# Altium PCB Modbus_Connecter.PcbDoc
Units mil, origin at the board's own origin, x right, y up, seen from the top; angles counter-clockwise.
Board outline 1082.68 x 2559.06 mil, 2 copper layers (Top Layer, Bottom Layer); 26 components, 26 nets, 90 pads, 1 vias.
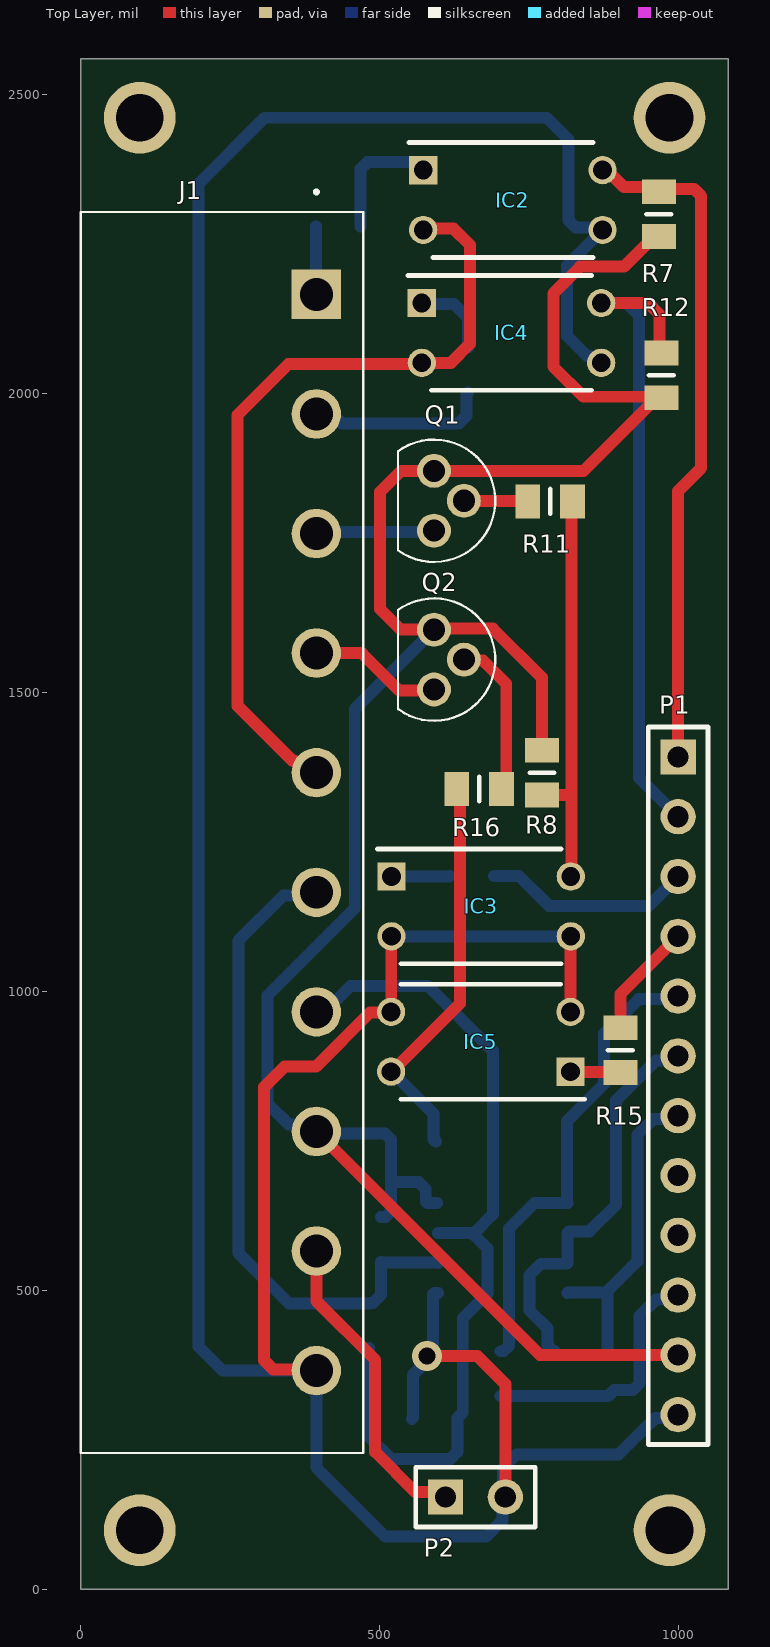
[diagram p0: Top Layer view]
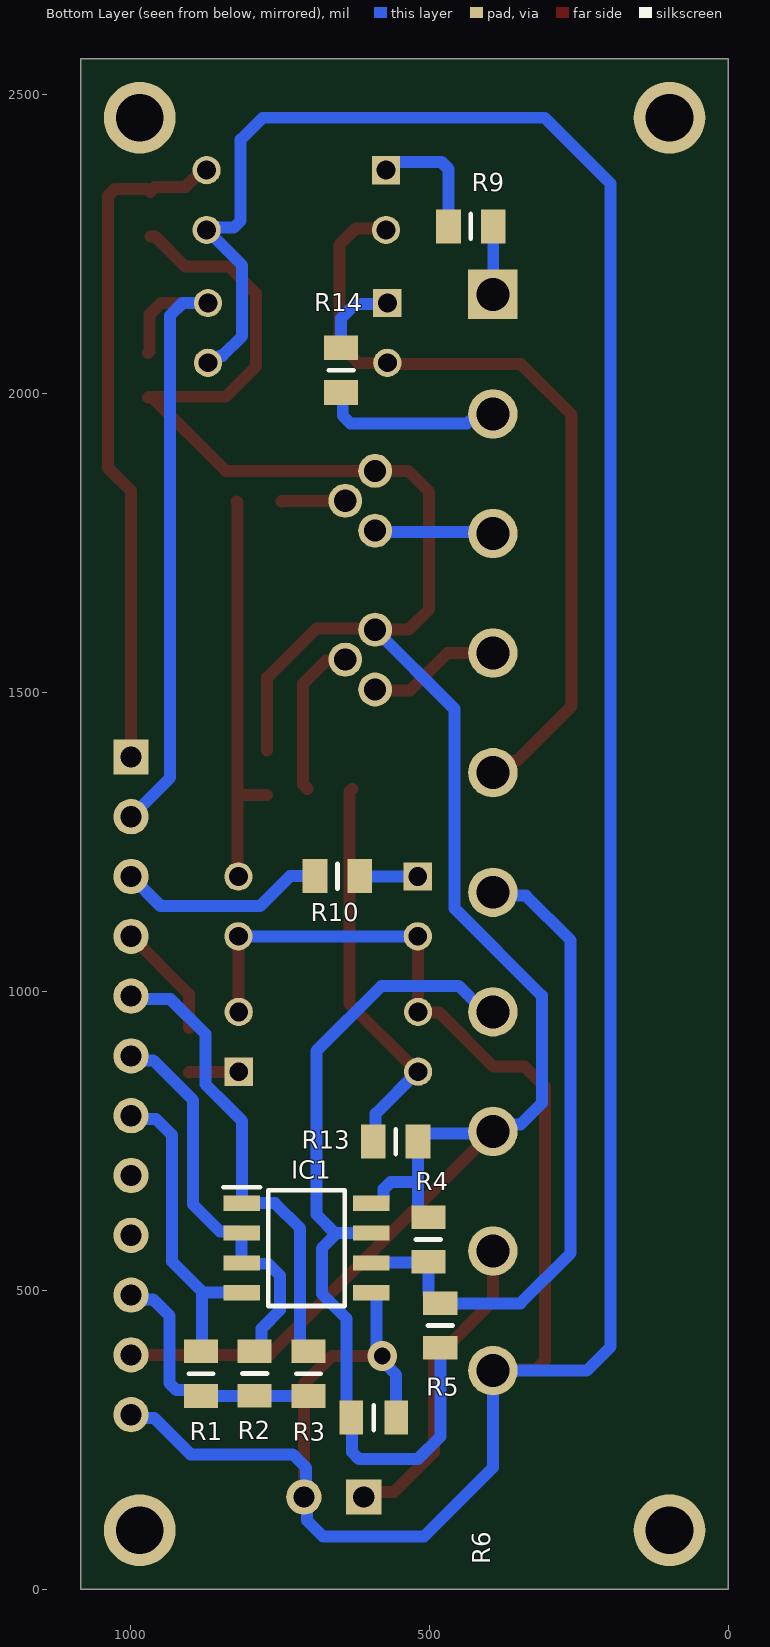
[diagram p1: Bottom Layer view, seen from below]
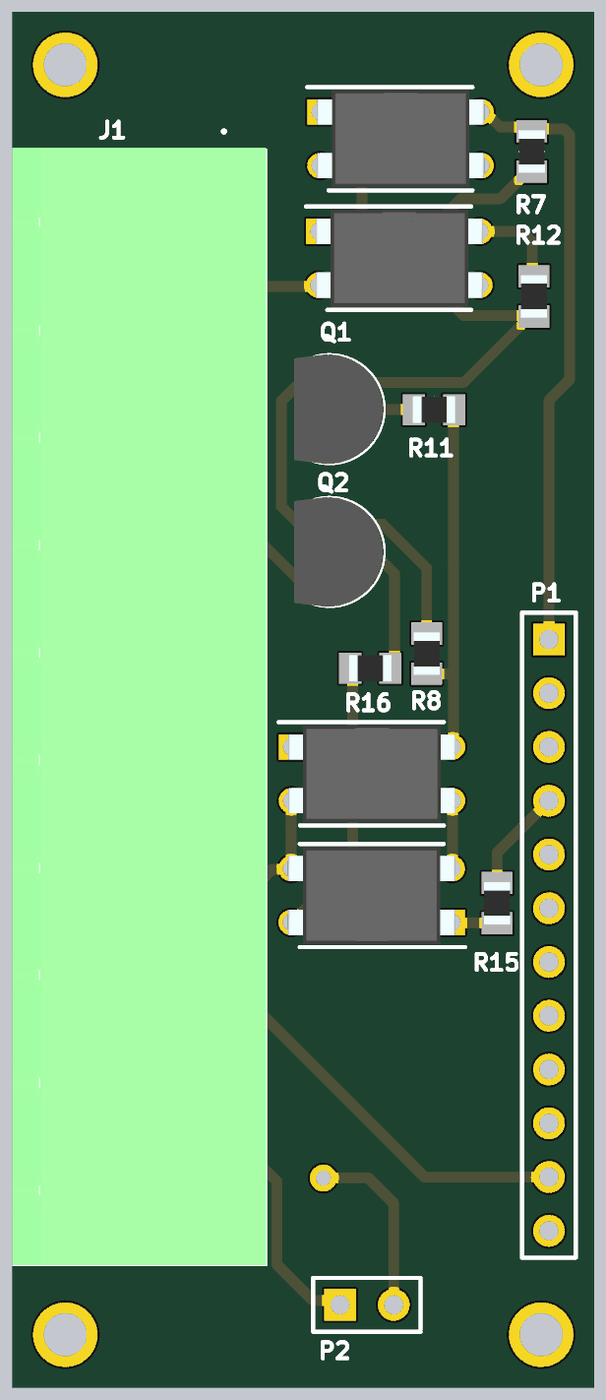
[diagram p2: 3D render of the assembled board from above, using the file's embedded part models]
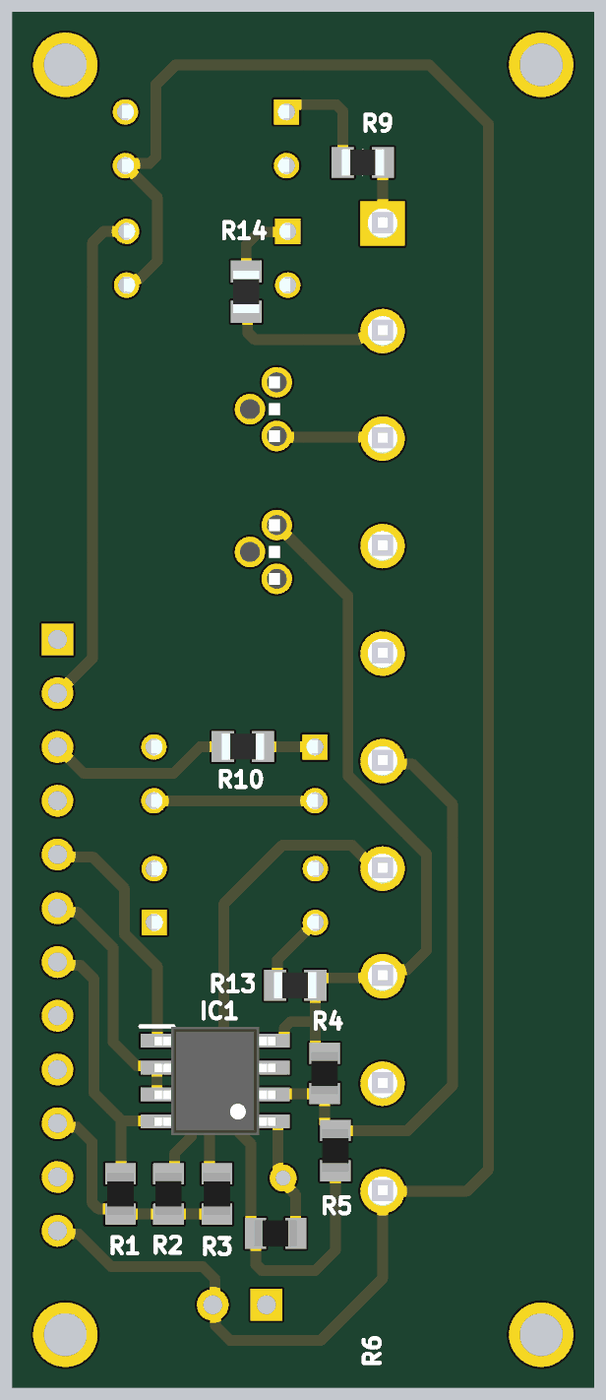
[diagram p3: 3D render of the assembled board from below, using the file's embedded part models]

## Layer stack, top to bottom
Top Solder: solder mask 0.4, Solder Resist, Dk 3.5
Top Layer: signal copper 1.4
Dielectric 1: dielectric 12.6, FR-4, Dk 4.8
Bottom Layer: signal copper 1.4
Bottom Solder: solder mask 0.4, Solder Resist, Dk 3.5

## Board outline
0,0 0,2559.06 1082.68,2559.06 1082.68,0

## Design rules (kind name [scope] priority, off if disabled: settings)
Clearance [All] p1: gap=10 ignorepadtopadclearanceinfootprint=FALSE except(0: Arc-Hole Track-Hole SMDPad-Hole THPad-Hole Via-Hole Fill-Hole Poly-Hole Region-Hole Text-Hole)
PolygonConnect [All] p1: connectstyle=Relief reliefconductorwidth=10 reliefentries=4 polygonreliefangle="90 Angle" airgapwidth=10
RoutingVias [All] p1: holewidth=28 width=50 viastyle="Through Hole" minholewidth=28 minwidth=50 maxholewidth=28 maxwidth=50
SolderMaskExpansion [All] p1: expansion=4 istentingtop=FALSE
Width [All] p1: maxlimit=30 minlimit=10 preferedwidth=20
30 further rules are at their usual default settings.

## Classes and differential pairs
component class Sheet4: IC2 IC3 IC4 IC5 Q1 Q2 R7 R8 R9 R10 R11 R12 R13 R14 R15 R16
component class Sheet3: IC1 J1 P1 P2 R1 R2 R3 R4 R5 R6

## Components (designator, comment, footprint, x,y, rotation, side; value= is the part's Value field where it differs from the comment)
IC1 "MAX485CSA" SOIC127P600X175-8N 705.47,570.4 r180 bottom
IC2 "PC817X2NSZ0F" DIP762W60P254L458H400Q4N 722.45,2323.04 r0 top
IC3 "PC817X2NSZ0F" DIP762W60P254L458H400Q4N 669.29,1141.73 r0 top
IC4 "PC817X2NSZ0F" DIP762W60P254L458H400Q4N 720.15,2100.81 r0 top
IC5 "PC817X2NSZ0F" DIP762W60P254L458H400Q4N 668.76,915.32 r180 top
J1 "1757323" 1757323 393.7,2165.35 r270 top
P1 "Header 12" HDR1X12 998.8,1391.68 r270 top
P2 "Header 2" HDR1X2 609.8,153.93 r0 top
Q1 "BC547BG" TO-92_(TO-226) 590.55,1870.08 r90 top
Q2 "BC547BG" TO-92_(TO-226) 590.55,1604.48 r90 top
R1 "10k" RESC2012X60N 881.8,360.34 r270 bottom
R2 "10k" RESC2012X60N 792.26,360.43 r270 bottom
R3 "10k" RESC2012X60N 702.09,360.34 r270 bottom
R4 "20k" RESC2012X60N 501.64,584.58 r90 bottom
R5 "120R" RESC2012X60N 481.66,440.85 r90 bottom
R6 "20k" RESC2012X60N 592.84,286.89 r0 bottom
R7 "RN73C2A10KLTDF" RESC2012X65N 966.56,2299.38 r270 top
R8 "RN73C2A10KLTDF" RESC2012X65N 771.13,1365.3 r90 top
R9 "PCF0805R-1K0BI" RESC2012X65N 430.52,2278.91 r0 bottom
R10 "PCF0805R-1K0BI" RESC2012X65N 653.69,1192.45 r180 bottom
R11 "PCF0805R-1K0BI" RESC2012X65N 784.78,1818.99 r180 top
R12 "RN73C2A10KLTDF" RESC2012X65N 970.86,2029.79 r270 top
R13 "RN73C2A10KLTDF" RESC2012X65N 556.28,748.33 r180 bottom
R14 "PCF0805R-1K0BI" RESC2012X65N 647.57,2038.61 r90 bottom
R15 "PCF0805R-1K0BI" RESC2012X65N 902.1,901.2 r270 top
R16 "PCF0805R-1K0BI" RESC2012X65N 666.14,1338.09 r0 top

## Footprints (in the part's own frame and the unit in brackets; to place one, negate y for a bottom-side part, rotate by r counter-clockwise, add the part's x,y. Pads: shape width x height; smd on the part's side, far side on the other; paste and mask are expansions set on the pad)
1757323 [mm]
  rect 2.1x2.1 hole 1.4: 1(0,0)
  round 2.1 hole 1.4: 2(5.08,0) 3(10.16,0) 4(15.24,0) 5(20.32,0) 6(25.4,0) 7(30.48,0) 8(35.56,0) 9(40.64,0) 10(45.72,0)
  silkscreen extent -4.4,-10 49.22,2, body extent -3.58,-10 49.22,2, height 9.2
DIP762W60P254L458H400Q4N [mm]
  rect 1.2x1.2 hole 0.8: 1(-3.81,1.27)
  round 1.2 hole 0.8: 2(-3.81,-1.27) 3(3.81,-1.27) 4(3.81,1.27)
  silkscreen extent -4.41,-2.44 3.4,2.44, body extent -3.96,-2.29 3.96,2.29, height 4
HDR1X2 [mm] "Connector; Header; 2 Position"
  rect 1.5x1.5 hole 0.9: 1(0,0)
  round 1.5 hole 0.9: 2(2.54,0)
  silkscreen extent -1.27,-1.27 3.81,1.27
HDR1X12 [mm] "Connector; Header; 12 Position"
  rect 1.5x1.5 hole 0.9: 1(0,0)
  round 1.5 hole 0.9: 2(2.54,0) 3(5.08,0) 4(7.62,0) 5(10.16,0) 6(12.7,0) 7(15.24,0) 8(17.78,0) 9(20.32,0) 10(22.86,0) 11(25.4,0) 12(27.94,0)
  silkscreen extent -1.27,-1.27 29.21,1.27
RESC2012X60N [mm]
  rect 1x1.45 smd: 1(-0.95,0) 2(0.95,0)
  silkscreen extent 0,-0.53 0,0.53, body extent -1,-0.63 1,0.63, height 0.5
RESC2012X65N [mm]
  rect 1.05x1.45 smd: 1(-0.95,0) 2(0.95,0)
  silkscreen extent 0,-0.53 0,0.53, body extent -1,-0.63 1,0.63, height 0.65
SOIC127P600X175-8N [mm]
  rect 1.55x0.65 smd: 1(-2.75,1.905) 2(-2.75,0.635) 3(-2.75,-0.635) 4(-2.75,-1.905) 5(2.75,-1.905) 6(2.75,-0.635) 7(2.75,0.635) 8(2.75,1.905)
  silkscreen extent -3.52,-2.46 1.63,2.58, body extent -2.86,-2.57 2.86,2.57, height 1.66
TO-92_(TO-226) [mm]
  round 1.44 hole 0.94: 1(0,0) 2(-1.27,-1.27) 3(-2.54,0)
  silkscreen extent -3.87,-2.6 1.33,1.53, body extent -3.87,-2.51 1.33,1.68, height 8.33

## Part data
IC1: "Integrated Circuit", Manufacturer_Name="Analog Devices", Mouser Part Number=N/A, Datasheet Link=https://datasheets.maximintegrated.com/en/ds/MAX1487-MAX491.pdf, Height=1.75mm, Manufacturer_Part_Number=MAX485CSA, Mouser Price/Stock=https://www.mouser.co.uk/ProductDetail/Maxim-Integrated/MAX485CSA?qs=LHmEVA8xxfbb%2FSUlm%252BHF3Q%3D%3D
IC2 IC3 IC4 IC5: "Integrated Circuit", Manufacturer_Name="Sharp Microelectronics", Mouser Part Number=N/A, Datasheet Link=https://datasheet.datasheetarchive.com/originals/distributors/Datasheets_SAMA/458e45842a103a05998fcebbd6f7366e.pdf, Height=4mm, Manufacturer_Part_Number=PC817X2NSZ0F, Mouser Price/Stock=https://www.mouser.co.uk/ProductDetail/Sharp-Microelectronics/PC817X2NSZ0F?qs=6kT3pPPHxnU7uYWM8Yy85A%3D%3D
J1: "Connector", Manufacturer_Name="Phoenix Contact", Mouser Part Number=651-1757323, Arrow Part Number=1757323, Arrow Price/Stock=https://www.arrow.com/en/products/1757323/phoenix-contact, Datasheet Link=http://www.phoenixcontact.com/de/produkte/1757323/pdf, Height=8.72mm, Manufacturer_Part_Number=1757323, Mouser Price/Stock=https://www.mouser.co.uk/ProductDetail/Phoenix-Contact/1757323?qs=o3rrLWFGhRnEONaPlNkZ%252Bw%3D%3D
P1: "Header, 12-Pin", LatestRevisionDate=17-Jul-2002, LatestRevisionNote="Re-released for DXP Platform.", Publisher="Altium Limited"
P2: "Header, 2-Pin", LatestRevisionDate=17-Jul-2002, LatestRevisionNote="Re-released for DXP Platform.", Publisher="Altium Limited"
Q1 Q2: "Transistor BJT NPN", Manufacturer_Name=onsemi, Mouser Part Number=N/A, Arrow Part Number=BC547BG, Arrow Price/Stock=http://www.arrow.com/en/products/bc547bg/on-semiconductor, Datasheet Link=https://www.onsemi.com/download/data-sheet/pdf/BC546-D.PDF, Height=5.33mm, Manufacturer_Part_Number=BC547BG, Mouser Price/Stock=http://www.mouser.com/Search/ProductDetail.aspx?qs=NSmgnqlvnz5NIKIycfR5CQ%3d%3d
R1 R2 R3: library part CR0805-FX-1002ELF, "Resistor", Manufacturer_Name=Bourns, Mouser Part Number=652-CR0805FX-1002ELF, Arrow Part Number=CR0805-FX-1002ELF, Arrow Price/Stock=https://www.arrow.com/en/products/cr0805-fx-1002elf/bourns?region=nac, Datasheet Link=https://www.bourns.com/pdfs/chpreztr.pdf, Height=0.6mm, Manufacturer_Part_Number=CR0805-FX-1002ELF, Mouser Price/Stock=https://www.mouser.co.uk/ProductDetail/Bourns/CR0805-FX-1002ELF?qs=tknLyCMIRbPr%252BDD0s0nG9g%3D%3D
R4 R6: library part CR0805-FX-2002ELF, "Resistor", Manufacturer_Name=Bourns, Mouser Part Number=652-CR0805FX-2002ELF, Arrow Part Number=CR0805-FX-2002ELF, Arrow Price/Stock=https://www.arrow.com/en/products/cr0805-fx-2002elf/bourns?region=nac, Datasheet Link=https://www.bourns.com/pdfs/chpreztr.pdf, Height=0.6mm, Manufacturer_Part_Number=CR0805-FX-2002ELF, Mouser Price/Stock=https://www.mouser.co.uk/ProductDetail/Bourns/CR0805-FX-2002ELF?qs=mEbcl8R%252Bl%252Bv8rqM1zQjjRA%3D%3D
R5: library part CR0805-JW-121ELF, "Resistor", Manufacturer_Name=Bourns, Mouser Part Number=652-CR0805JW-121ELF, Arrow Part Number=CR0805-JW-121ELF, Arrow Price/Stock=https://www.arrow.com/en/products/cr0805-jw-121elf/bourns?region=nac, Datasheet Link=https://www.bourns.com/pdfs/chpreztr.pdf, Height=0.6mm, Manufacturer_Part_Number=CR0805-JW-121ELF, Mouser Price/Stock=https://www.mouser.co.uk/ProductDetail/Bourns/CR0805-JW-121ELF?qs=wL7NMIHXUPnmcuStpLOKew%3D%3D
R7 R8 R12 R13: "Resistor", Manufacturer_Name="TE Connectivity", Mouser Part Number=279-RN73C2A10KLTDF, Datasheet Link=http://docs-europe.electrocomponents.com/webdocs/1488/0900766b814885e5.pdf, Height=0.65mm, Manufacturer_Part_Number=RN73C2A10KLTDF, Mouser Price/Stock=https://www.mouser.co.uk/ProductDetail/TE-Connectivity-Holsworthy/RN73C2A10KLTDF?qs=1Hpg7qxOs69sC8pHBMR1GQ%3D%3D
R9 R10 R11 R14 R15 R16: "Resistor", Manufacturer_Name="TT Electronics", Mouser Part Number=756-PCF0805R1K0BI, Datasheet Link=https://componentsearchengine.com/Datasheets/1/PCF0805-13-10KBT1.pdf, Height=0.65mm, Manufacturer_Part_Number=PCF0805R-1K0BI, Mouser Price/Stock=https://www.mouser.co.uk/ProductDetail/Welwyn-Components-TT-Electronics/PCF0805R-1K0BI?qs=mbEfOQsdCzdnsA0Coprz5g%3D%3D

## Free pads (board coordinates)
  round 120 hole 80: 3(98.43,2460.63) 3(984.25,98.43) 3(984.25,2460.63) 7(98.43,98.43)

## Via types
v1: diameter 50, hole 28, Top Layer to Bottom Layer, 1 vias

## Nets (pads, with @x,y where several pads share a name; then routed paths per layer and width w, separated by ;. In a path a pad name is that pad's centre, name@x,y a point inside that pad or via, vN(x,y) a via of type N, cw(c..) or ccw(c..) an arc to the next point about the centre after c; other vN are vias at no path point)
3V3: P1.10 R1.2 R2.2 R3.2 | length 432.6
  Bottom Layer w20: R3.2 792.26,322.94 R1.2 891.45,332.58 922.81,332.58 934.53,344.3 934.53,456.96 961.93,484.37 991.49,484.37 P1.10
+5: IC1.8 J1.8 P1.11 Q1.1 Q2.1 R4.2 R7.2 R8.2 R12.2 R13.2 | length 3849.6
  Top Layer w20: J1.8 767.38,391.68 P1.11 ; Q2.1 534.76,1604.48 500.41,1638.83 500.41,1835.06 535.43,1870.08 840.68,1870.08 R12.2@962.99,1992.39 ; Q2.1@590.55,1606.37 688.95,1606.37 771.13,1524.19 R8.2 ; R7.2 958.68,2261.98 908.26,2211.55 834.88,2211.55 790.11,2166.77 790.11,2044.43 840.48,1994.06 969.19,1994.06 R12.2
  Bottom Layer w20: R4.2 509.1,621.98 518.78,631.66 518.78,688.12 ; 518.81,682.67 520.86,680.62 564.87,680.62 576.69,668.79 576.69,648.2 579.49,645.4 IC1.8@595.84,645.4 ; 518.88,688.43 R13.2 518.88,751.54 508.21,762.21 396.84,762.21 J1.8 381.71,777.35 347.24,777.35 311.93,812.65 311.93,992.4 457.95,1138.41 457.95,1471.88 Q2.1
+12V: J1.9 P2.1 | length 525.7
  Top Layer w20: J1.9 393.7,481.81 492.02,383.5 492.02,229.46 559.24,162.23 601.5,162.23 P2.1
A: IC1.6 J1.6 R4.1 R5.2 | length 1115.6
  Bottom Layer w20: J1.6 388.09,1159.75 338.42,1159.75 263.61,1084.94 263.61,561.82 347.68,477.75 481.15,477.75 R5.2 488.1,478.25 501.51,491.66 501.51,547.05 R4.1 ; R4.1@502.52,546.29 596.32,546.29 IC1.6
B: IC1.7 J1.7 R5.1 R6.2 | length 1449.2
  Bottom Layer w20: J1.7 407.41,965.35 451,1008.94 579.87,1008.94 688.98,899.84 688.98,626.66 657.71,595.4 IC1.7 ; R5.1 481.66,255.1 519.12,217.64 617.92,217.64 629.64,229.36 R6.2@629.64,286.28 ; R6.2 638.61,295.25 638.61,452.74 679.8,493.94 679.8,569.86 654.6,595.06
EXT_GND: IC2.2 IC4.2 J1.5 | length 1358.6
  Top Layer w20: J1.5 376.74,1365.35 356.4,1385.69 353.15,1385.69 261.98,1476.86 261.98,1963.82 346.75,2048.59 567.93,2048.59 IC4.2 618.97,2050.81 650.53,2082.37 650.53,2247.97 622.99,2275.52 574.93,2275.52 IC2.2
GND: IC1.5 IC2.3 IC3.2 IC3.3 IC4.3 IC5.2 IC5.3 J1.10 P1.12 P2.2 R6.1 | length 6205
  Top Layer w20: J1.10 391.55,367.51 321.23,367.51 306.23,382.51 306.23,839.51 340.47,873.76 393.11,873.76 483.8,964.45 517.89,964.45 IC5.3 ; IC5.3@519.03,969.23 519.03,1091.47 IC3.2 ; v1(578.74,389.76) 663,389.76 709.8,342.96 P2.2 ; IC5.2 819.03,965.59 819.03,1091.47 IC3.3
  Bottom Layer w20: IC3.2 IC3.3 ; R6.1@553.32,284.77 R6.1 555.44,358.34 578.74,381.65 578.74,397.88 588.64,407.78 588.64,492.61 591.44,495.4 IC1.5 ; IC4.3 862.78,2050.81 851.1,2062.49 846,2062.49 813.12,2095.38 813.12,2213.7 IC2.3 868.53,2276.97 827.29,2276.97 815.58,2288.68 815.58,2423.92 778.87,2460.63 306.99,2460.63 196.85,2350.49 196.85,405.42 236.91,365.35 J1.10 393.7,203.03 509.04,87.69 677.58,87.69 704.72,114.83 704.72,148.85 P2.2 706.09,157.65 706.09,202.71 728.59,225.22 899.42,225.22 960.25,286.05 993.17,286.05 P1.12
IN_1: J1.1 R9.1 | length 113.8
  Bottom Layer w20: R9.1 393.12,2165.94 J1.1
IN_2: J1.2 R14.1 | length 302.9
  Bottom Layer w20: J1.2 405.69,1953.36 433.06,1953.36 436.76,1949.67 632.22,1949.67 644.81,1962.25 644.81,1998.44 R14.1
IN_TOM_1: IC2.4 P1.1 R7.1 | length 1140.8
  Top Layer w20: IC2.4 879.83,2373.04 908.02,2344.85 958.49,2344.85 R7.1 971.31,2341.54 1025.62,2341.54 1037.33,2329.82 1037.33,1874.98 998.8,1836.45 P1.1
IN_TOM_2: IC4.4 P1.2 R12.1 | length 1108.6
  Top Layer w20: IC4.4 948.59,2150.81 967.92,2131.48 967.92,2070.13 R12.1
  Bottom Layer w20: IC4.4 912.71,2150.81 933.35,2130.17 933.35,1357.13 P1.2
M_RX: IC1.1 P1.5 R3.1 | length 784.5
  Bottom Layer w20: R3.1 706.38,397.74 716.06,407.43 716.06,603.21 758.25,645.4 IC1.1@800.2,645.4 ; IC1.1@803,645.4 IC1.1 ; IC1.1@813.14,646 813.14,782.85 838.3,808.01 874.56,844.27 874.56,928.51 932.82,986.76 993.89,986.76 P1.5
M_TX: IC1.4 P1.7 R1.1 | length 530
  Bottom Layer w20: IC1.4 814.34,496 878.49,496 879.56,497.06 ; R1.1@880.49,399.05 880.49,496.13 879.56,497.06 ; 930.69,601.02 930.69,548.19 879.56,497.06 ; 930.69,601.02 930.69,706.68 930.69,759.51 956.99,785.82 992.94,785.82 P1.7
NetIC2_1: IC2.1 R9.2 | length 211.1
  Bottom Layer w20: R9.2 467.92,2374.95 479.64,2386.66 558.83,2386.66 IC2.1
NetIC3_1: IC3.1 R10.2 | length 97.3
  Bottom Layer w20: IC3.1 519.65,1192.09 615.93,1192.09 R10.2
NetIC3_4: IC3.4 R8.1 R11.1 | length 677.1
  Top Layer w20: R8.1 819.76,1327.9 ; IC3.4 820.73,1193.17 820.73,1327.9 820.73,1810.6 820.73,1817.54 R11.1
NetIC4_1: IC4.1 R14.2 | length 135.4
  Bottom Layer w20: IC4.1@571.51,2149.45 623.45,2149.45 647.57,2125.33 R14.2
NetIC5_1: IC5.1 R15.2 | length 84
  Top Layer w20: IC5.1 819.01,865.07 819.84,865.07 820.48,864.44 901.47,864.44 R15.2
NetIC5_4: IC5.4 R13.1 R16.1 | length 671.9
  Top Layer w20: IC5.4 519.01,865.07 519.84,865.07 633.69,978.93 633.69,1333.14 R16.1
  Bottom Layer w20: IC5.4 519.01,865.07 519.84,865.07 589.75,795.16 589.75,752.27 R13.1
NetQ1_2: Q1.2 R11.2 | length 107.3
  Top Layer w20: Q1.2 641.09,1819.54 746.83,1819.54 R11.2
NetQ2_2: Q2.2 R16.2 | length 266.8
  Top Layer w20: Q2.2 642.36,1552.68 672.8,1552.68 711.31,1514.17 711.31,1345.85 R16.2
OUT_1: J1.3 Q1.3 | length 198.8
  Bottom Layer w20: J1.3 396.06,1767.72 588.19,1767.72 Q1.3
OUT_2: J1.4 Q2.3 | length 223.6
  Top Layer w20: J1.4 470,1565.35 532.67,1502.68 588.75,1502.68 Q2.3
OUT_FM_1: P1.3 R10.1 | length 348.8
  Bottom Layer w20: R10.1 732.94,1192.45 782.96,1142.43 949.55,1142.43 P1.3
OUT_FM_2: P1.4 R15.1 | length 193.1
  Top Layer w20: R15.1 902.1,994.98 P1.4
TX_EN: IC1.2 IC1.3 P1.6 R2.1 | length 676.2
  Bottom Layer w20: R2.1 790.12,397.83 780.43,407.52 780.43,435.8 749.91,466.33 749.91,524.74 769.29,544.12 IC1.3@812.46,544.12 ; IC1.3 IC1.2 816.53,598.2 850.34,598.2 895.08,642.94 895.08,817.37 962.01,884.29 991.42,884.29 P1.6
pads on no net: P1.8 P1.9

## Silkscreen, mask and mechanical layers (free items; w line width, h text height)
Mechanical 1:
  the board outline again, w10